# EAGLE board LoRa_Sensor_RevA1 (EAGLE 9.6.2)
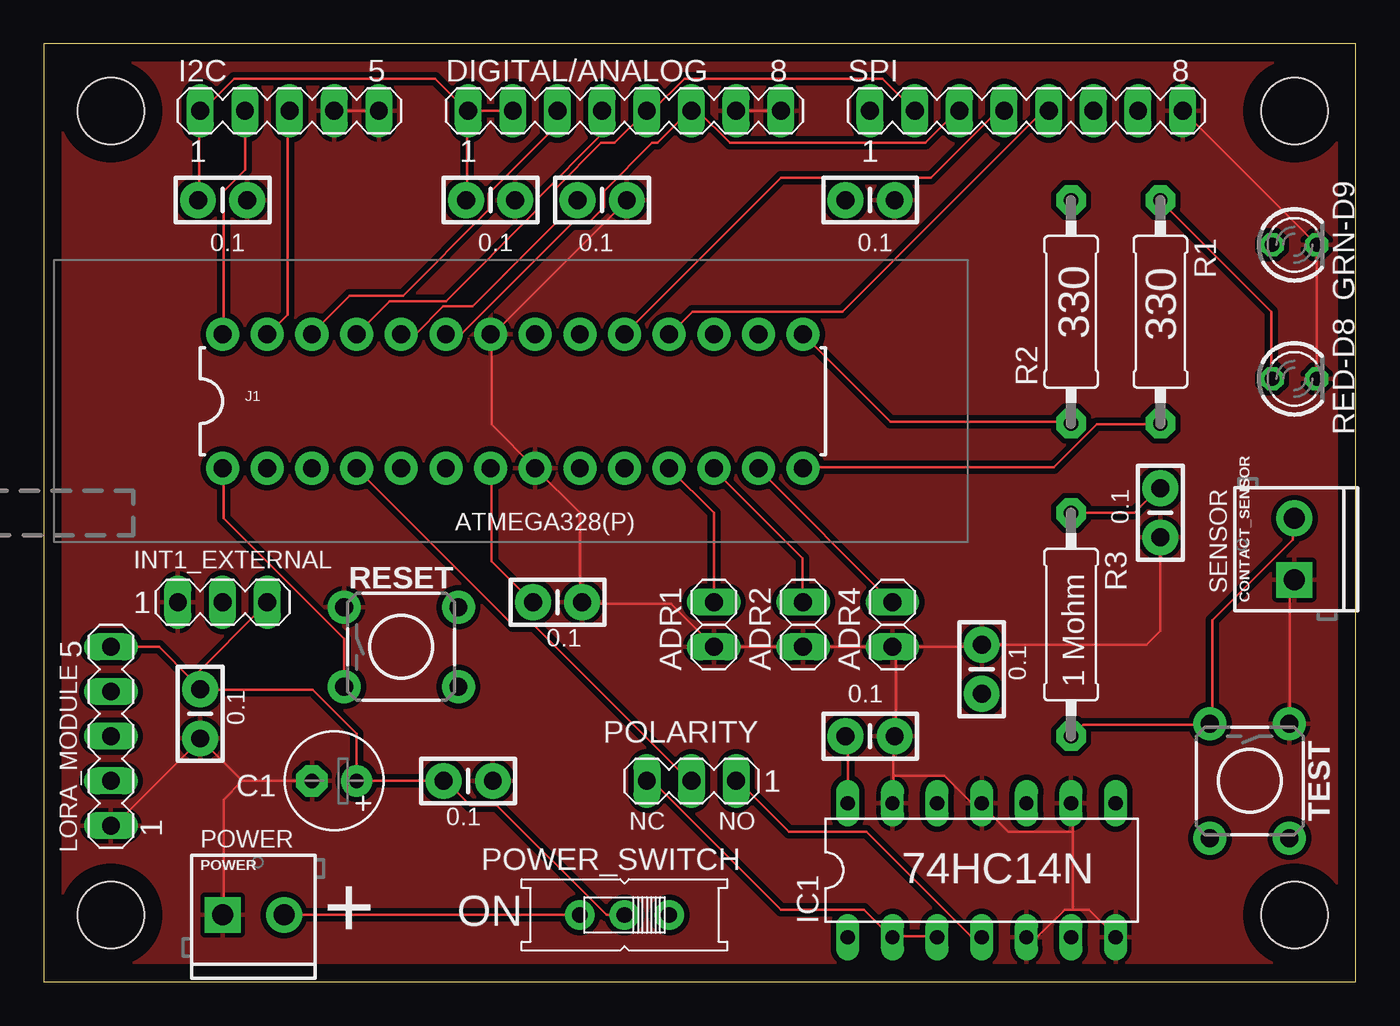
[diagram p0: board, top side]
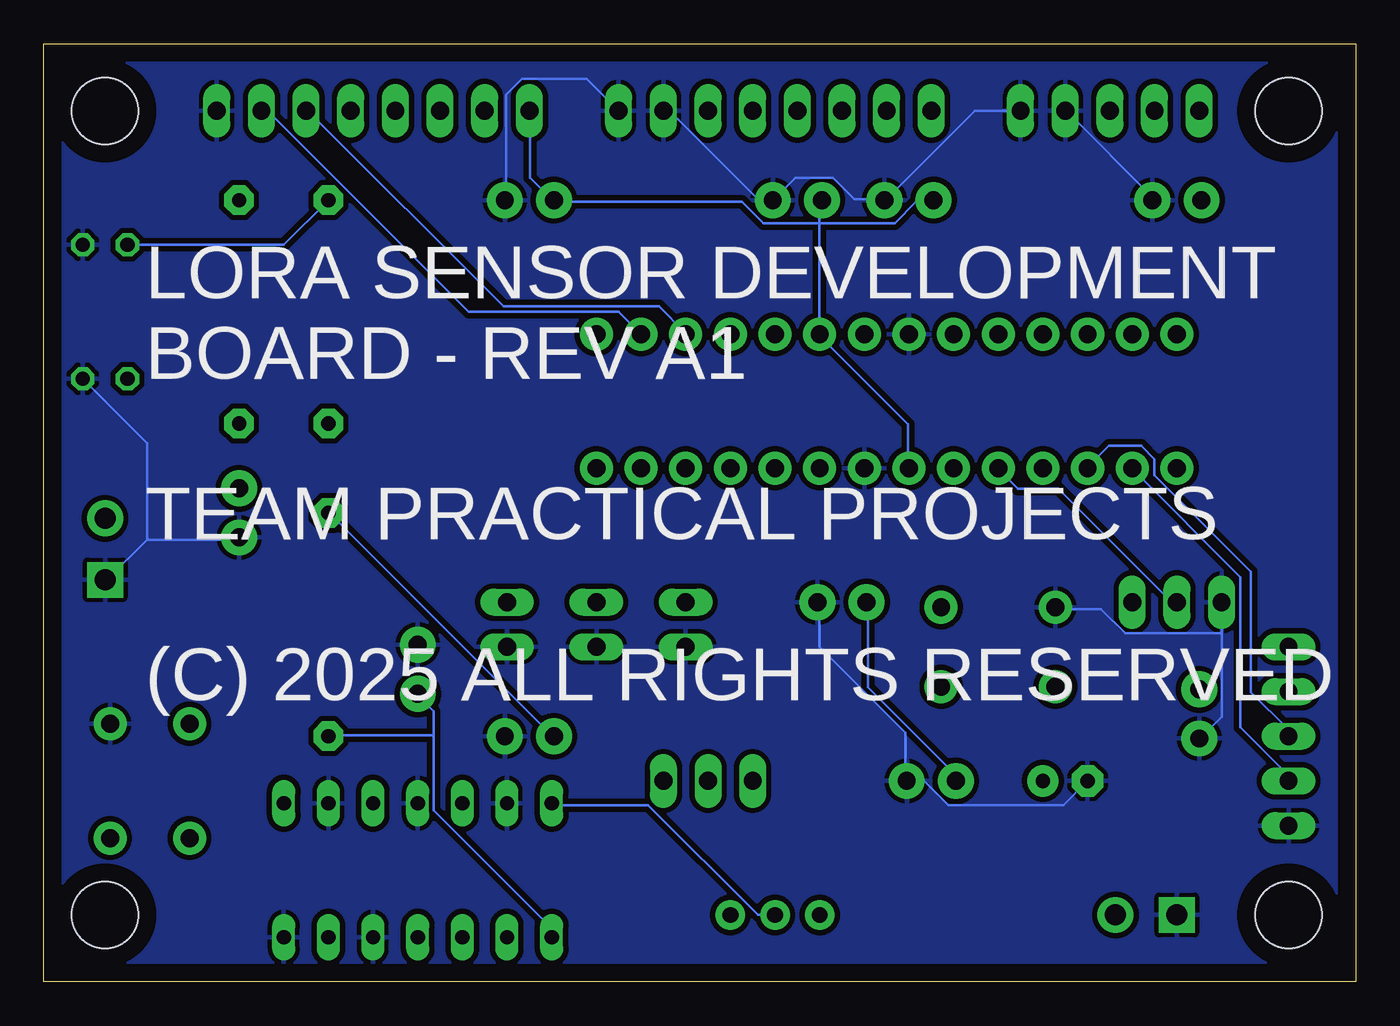
[diagram p1: board, bottom side, seen from below]

Size 74.6 x 53.33 mm. Coordinates in mm from the lower left corner, seen from the top.
Outline: 0,0 74.6,0 74.6,53.33 0,53.33 0,0
Copper layers (1*16): Top 0.035mm / dielectric 1.5mm / Bottom 0.035mm
Design rules "default": minimum track width 6mil, minimum drill 0.35mm, track to track 6mil, track to pad 6mil, pad to pad 6mil, via to via 6mil, smd to smd 6mil, copper to edge 40mil, drill to drill 6mil, minimum pad ring 10mil, minimum via ring 8mil, stop-mask expansion 4mil, vias tented up to drill 0mil, thermal gap 10mil
Holes 3.8 mm at 3.81,3.81 71.12,3.81 3.81,49.53 71.12,49.53

## Footprints (pad centres in the part's own frame; a part is rotated, then mirrored left to right if it is on the bottom)
1X02 = drill 1.016 long: 1 -1.27,0; 2 1.27,0
E2,5-6 = drill 0.813 pad 1.778: + -1.27,0 | drill 0.813 pad 1.778 octagon: - 1.27,0
CAP-PTH-SMALL-KIT = drill 1.016 pad 2.032: 1 -1.397,0; 2 1.397,0
SCREWTERMINAL-3.5MM-2 = drill 1.2 pad 2.032 square: 1 0,0 | drill 1.2 pad 2.032: 2 3.5,0
MA08-1 = drill 1.016 long: 1 -8.89,0; 2 -6.35,0; 3 -3.81,0; 4 -1.27,0; 5 1.27,0; 6 3.81,0; 7 6.35,0; 8 8.89,0
LED3MM = drill 0.813 octagon: A -1.27,0; K 1.27,0
MA05-1 = drill 1.016 long: 1 -5.08,0; 2 -2.54,0; 3 0,0; 4 2.54,0; 5 5.08,0
DIL14 = drill 0.813 long: 1 -7.62,-3.81; 2 -5.08,-3.81; 3 -2.54,-3.81; 4 0,-3.81; 5 2.54,-3.81; 6 5.08,-3.81; 7 7.62,-3.81; 8 7.62,3.81; 9 5.08,3.81; 10 2.54,3.81; 11 0,3.81; 12 -2.54,3.81; 13 -5.08,3.81; 14 -7.62,3.81
MA03-1 = drill 1.016 long: 1 -2.54,0; 2 0,0; 3 2.54,0
DIL28-3-ZIF_SOCKET = drill 1.016 pad 1.88: 1 -16.51,-3.81; 2 -13.97,-3.81; 3 -11.43,-3.81; 4 -8.89,-3.81; 5 -6.35,-3.81; 6 -3.81,-3.81; 7 -1.27,-3.81; 8 1.27,-3.81; 9 3.81,-3.81; 10 6.35,-3.81; 11 8.89,-3.81; 12 11.43,-3.81; 13 13.97,-3.81; 14 16.51,-3.81; 15 16.51,3.81; 16 13.97,3.81; 17 11.43,3.81; 18 8.89,3.81; 19 6.35,3.81; 20 3.81,3.81; 21 1.27,3.81; 22 -1.27,3.81; 23 -3.81,3.81; 24 -6.35,3.81; 25 -8.89,3.81; 26 -11.43,3.81; 27 -13.97,3.81; 28 -16.51,3.81
EG1218 = drill 0.9 pad 1.676: O -2.54,0; P 0,0; S 2.54,0
0309/12 = drill 0.813 pad 1.676 octagon: 1 -6.35,0; 2 6.35,0
TACTILE_SWITCH_PTH_6.0MM = drill 1.016 pad 1.88: 1 -3.251,2.261; 2 3.251,2.261; 3 -3.251,-2.261; 4 3.251,-2.261

## Placement (x,y rotation side)
ADR1  [1X02]  38.1,20.32 90 top
ADR2  [1X02]  43.18,20.32 90 top
ADR4  [1X02]  48.26,20.32 90 top
C1  100 uF  [E2,5-6]  16.51,11.43 180 top
C2  0.1uF  [CAP-PTH-SMALL-KIT]  25.4,44.45 0 top
C3  0.1uF  [CAP-PTH-SMALL-KIT]  10.16,44.45 0 top
C4  0.1uF  [CAP-PTH-SMALL-KIT]  8.89,15.24 270 top
C5  0.1uF  [CAP-PTH-SMALL-KIT]  46.99,13.97 0 top
C6  0.1uF  [CAP-PTH-SMALL-KIT]  29.21,21.59 0 top
C7  0.1uF  [CAP-PTH-SMALL-KIT]  53.34,17.78 90 top
C8  0.1uF  [CAP-PTH-SMALL-KIT]  24.13,11.43 0 top
C9  0.1uF  [CAP-PTH-SMALL-KIT]  63.5,26.67 270 top
C10  0.1uF  [CAP-PTH-SMALL-KIT]  46.99,44.45 0 top
C11  0.1uF  [CAP-PTH-SMALL-KIT]  31.75,44.45 0 top
CONTACT_SENSOR  [SCREWTERMINAL-3.5MM-2]  71.12,22.86 90 top
DIGITAL/ANALOG  [MA08-1]  33.02,49.53 0 top
GRN-D9  TLLG4400  [LED3MM]  71.12,41.91 0 top
I2C  [MA05-1]  13.97,49.53 0 top
IC1  74HC14N  [DIL14]  53.34,6.35 0 top
INT1_EXTERNAL  [MA03-1]  10.16,21.59 0 top
J1  ZIFSOCKET-28-3"  [DIL28-3-ZIF_SOCKET]  26.67,33.02 0 top
LORA_MODULE  [MA05-1]  3.81,13.97 90 top
POLARITY  [MA03-1]  36.83,11.43 180 top
POWER  [SCREWTERMINAL-3.5MM-2]  10.16,3.81 0 top
POWER_SWITCH  [EG1218]  33.02,3.81 180 top
R1  330  [0309/12]  63.5,38.1 270 top
R2  330  [0309/12]  58.42,38.1 90 top
R3  1 Mohm  [0309/12]  58.42,20.32 270 top
RED-D8  TLLR4400  [LED3MM]  71.12,34.29 0 top
RESET  MOMENTARY-SWITCH-SPST-PTH-6.0MM  [TACTILE_SWITCH_PTH_6.0MM]  20.32,19.05 0 top
SPI  [MA08-1]  55.88,49.53 0 top
TEST  MOMENTARY-SWITCH-SPST-PTH-6.0MM  [TACTILE_SWITCH_PTH_6.0MM]  68.58,11.43 270 top

## Library data of the parts
ADR1 ADR2 ADR4 = pinhead
C1 POWER_SWITCH R1-R3 = adafruit
C2-C11 = SparkFun-Capacitors; PROD_ID: CAP-08370
CONTACT_SENSOR POWER = SparkFun-Connectors; PROD_ID: CONN-08399
DIGITAL/ANALOG I2C INT1_EXTERNAL LORA_MODULE POLARITY SPI = con-lstb; OC_FARNELL: unknown; OC_NEWARK: unknown
GRN-D9 = led; MF: VISHAY SEMICONDUCTOR; OC_FARNELL: 1612435
IC1 = 74xx-eu
J1 = SparkFun-Connectors; PROD_ID: CONN-10960; SF_ID: PRT-09175
RED-D8 = led; MF: VISHAY SEMICONDUCTOR; OC_FARNELL: 1612437
RESET TEST = SparkFun-Switches; PROD_ID: SWCH-08441; SF_SKU: COM-00097

## Nets
!SS: J1.16 SPI.7
ATMEGA_!RESET: J1.1 RESET.3
ATMEGA_RXD: J1.2 LORA_MODULE.2
ATMEGA_TXD: J1.3 LORA_MODULE.3
D14: DIGITAL/ANALOG.6 J1.23 SPI.3
D15: DIGITAL/ANALOG.5 J1.24 SPI.2
D16: DIGITAL/ANALOG.4 J1.25
D17: DIGITAL/ANALOG.3 J1.26
GND: ADR1.1 ADR2.1 ADR4.1 C1.- C2.2 C3.2 C4.2 C5.2 C6.2 C7.2 C8.2 C9.2 C10.2 C11.2 CONTACT_SENSOR.1 DIGITAL/ANALOG.7 DIGITAL/ANALOG.8 GRN-D9.K I2C.4 I2C.5 IC1.5 IC1.7 IC1.9 IC1.11 IC1.13 INT1_EXTERNAL.1 J1.8 J1.22 LORA_MODULE.1 POWER.1 RED-D8.K RESET.1 SPI.8 TEST.1
INT0: J1.4 POLARITY.2
INT1: INT1_EXTERNAL.2 J1.5
MISO: J1.18 SPI.5
MOSI: J1.17 SPI.6
N$1: C7.1 CONTACT_SENSOR.2 IC1.1 R3.2 TEST.3
N$2: POWER.2 POWER_SWITCH.S
N$3: J1.15 R2.1
N$4: GRN-D9.A R2.2
N$5: J1.14 R1.2
N$6: R1.1 RED-D8.A
N$7: ADR4.2 J1.13
N$8: IC1.2 IC1.3 POLARITY.3
N$9: IC1.4 POLARITY.1
N$10: ADR2.2 J1.12
N$11: ADR1.2 J1.11
SCK: J1.19 SPI.4
SCL: I2C.2 J1.28
SDA: I2C.3 J1.27
VCC: C1.+ C2.1 C3.1 C4.1 C5.1 C6.1 C8.1 C9.1 C10.1 C11.1 DIGITAL/ANALOG.1 DIGITAL/ANALOG.2 I2C.1 IC1.14 INT1_EXTERNAL.3 J1.7 J1.20 LORA_MODULE.5 POWER_SWITCH.P R3.1 SPI.1

## Tracks (layer width: path | path; a pad name or v marks a point on that pad's centre or on a via)
!SS
  Bottom 0.152: SPI.7 61.87,49.53 50.44,38.1 41.91,38.1 J1.16
ATMEGA_!RESET
  Top 0.152: RESET.3 17.07,19.51 10.21,26.36 10.21,29.11 J1.1
ATMEGA_RXD
  Bottom 0.152: LORA_MODULE.2 3.81,11.73 6.55,14.48 6.55,23.01 12.65,29.11 J1.2
ATMEGA_TXD
  Bottom 0.152: LORA_MODULE.3 3.81,14.33 5.94,16.46 5.94,23.32 11.43,28.8 11.43,29.72 12.19,30.48 14.02,30.48 15.24,29.26 J1.3
D14
  Top 0.152: SPI.3 51.97,49.53 50.14,47.7 39.01,47.7 37.19,49.53 DIGITAL/ANALOG.6 36.73,49.53 34.9,47.7 34.59,47.7 31.85,44.96 31.85,44.04 30.94,43.13 30.02,43.13 23.77,36.88 22.86,36.88 J1.23
D15
  Top 0.152: SPI.2 47.7,51.36 36.42,51.36 34.59,49.53 DIGITAL/ANALOG.5 32.46,47.7 31.7,47.7 29.11,45.11 29.11,43.13 24.38,38.41 22.71,38.41 21.18,36.88 20.42,36.88 J1.24
D16
  Top 0.152: J1.25 19.66,38.71 22.86,38.71 28.04,43.89 28.04,44.5 31.7,48.16 31.7,49.53 DIGITAL/ANALOG.4
D17
  Top 0.152: DIGITAL/ANALOG.3 29.11,49.53 29.11,48.62 25.3,44.81 25.3,43.89 20.42,39.01 17.37,39.01 15.24,36.88 J1.26
GND
  Top 0.152: TEST.1 70.87,14.78 70.87,22.71 71.02,22.86 CONTACT_SENSOR.1 | RED-D8.K GRN-D9.K SPI.8 | I2C.5 I2C.4 | DIGITAL/ANALOG.8 DIGITAL/ANALOG.7 | LORA_MODULE.1 3.81,8.99 4.12,8.99 8.84,13.72 C4.2 8.99,13.72 11.28,11.43 | 11.28,11.43 C1.- | 11.28,11.43 10.21,10.36 10.21,3.81 POWER.1 | 25.45,36.73 25.45,31.7 J1.8 30.48,26.67 30.48,21.64 C6.2 30.63,21.49 35.66,21.49 ADR1.1 ADR2.1 ADR4.1 | 58.52,4.12 59.44,4.12 60.96,2.59 IC1.7 | 58.52,4.12 58.06,4.12 56.54,2.59 55.93,2.59 IC1.5 | 58.52,4.12 58.52,8.53 | 58.52,8.53 58.52,10.06 IC1.9 | 48.31,11.73 48.31,13.87 C5.2 48.46,14.02 48.46,19.05 | 48.31,11.73 48.31,10.21 IC1.13 | 48.31,11.73 51.21,11.73 52.73,10.21 53.34,10.21 IC1.11 53.34,10.06 54.86,8.53 58.52,8.53 | ADR4.1 48.46,19.05 | 48.46,19.05 53.34,19.05 C7.2 62.71,19.18 63.5,19.96 C9.2 | 48.31,19.05 ADR4.1 | 25.45,36.73 33.07,44.35 C11.2 | 25.45,36.73 J1.22
  Bottom 0.152: 68.73,25.15 63.55,25.15 C9.2 | 68.73,25.15 71.02,22.86 CONTACT_SENSOR.1 | 68.73,25.15 68.73,30.63 RED-D8.K | I2C.4 16.46,49.53 11.43,44.5 C3.2 | DIGITAL/ANALOG.7 39.01,49.53 33.98,44.5 33.22,44.5 C11.2 33.07,44.5 31.85,45.72 29.72,45.72 28.5,44.5 26.82,44.5 C2.2 26.67,44.5 21.64,49.53 I2C.5 | DIGITAL/ANALOG.8 43.74,51.36 47.4,51.36 48.31,50.44 48.31,44.5 C10.2 | 7.62,19.81 7.62,15.09 8.84,13.87 C4.2 | 7.62,19.81 INT1_EXTERNAL.1 | 7.62,19.81 13.11,19.81 14.48,21.18 17.07,21.18 RESET.1 | C1.- 16.61,10.06 23.16,10.06 24.54,11.43 C8.2 25.6,11.43 25.6,14.17 30.48,19.05 30.48,21.49 C6.2
  pour Top (isolate 0.305): 0,0 0,53.34 74.93,53.34 74.93,0
  pour Bottom (isolate 0.305): 0,0 0,53.34 74.93,53.34 74.93,0
INT0
  Top 0.152: POLARITY.2 36.73,11.43 27.89,20.27 26.67,20.27 17.83,29.11 J1.4
INT1
  Bottom 0.152: INT1_EXTERNAL.2 10.21,21.64 10.52,21.64 16.92,28.04 19.2,28.04 20.27,29.11 J1.5
MISO
  Top 0.152: SPI.5 56.84,49.53 45.41,38.1 36.88,38.1 35.66,36.88 J1.18
MOSI
  Bottom 0.152: SPI.6 59.59,49.53 48.46,38.41 39.62,38.41 38.1,36.88 J1.17
N$1
  Top 0.152: R3.2 58.52,14.02 59.13,14.63 66.29,14.63 TEST.3 66.45,14.78 66.45,20.57 71.02,25.15 71.02,26.21 CONTACT_SENSOR.2
  Bottom 0.152: IC1.1 45.72,3.05 52.43,9.75 52.43,14.02 | 52.43,14.02 52.43,15.39 53.34,16.31 C7.1 | 52.43,14.02 58.37,14.02 R3.2
N$2
  Top 0.152: POWER.2 POWER_SWITCH.S
N$3
  Top 0.152: J1.15 48.16,31.85 58.37,31.85 R2.1
N$4
  Bottom 0.152: GRN-D9.A 60.96,41.91 R2.2
N$5
  Top 0.152: R1.2 63.4,31.7 59.89,31.7 57.45,29.26 43.28,29.26 J1.14
N$6
  Top 0.152: RED-D8.A 69.8,34.29 69.8,38.1 63.55,44.35 R1.1
N$7
  Top 0.152: ADR4.2 48.16,21.64 40.69,29.11 J1.13
N$8
  Top 0.152: IC1.3 50.75,2.59 48.31,2.59 IC1.2 48.16,2.59 46.63,4.12 41.91,4.12 34.59,11.43 POLARITY.3
N$9
  Top 0.152: IC1.4 53.34,2.59 52.73,2.59 46.79,8.53 42.37,8.53 39.47,11.43 POLARITY.1
N$10
  Top 0.152: ADR2.2 43.13,21.64 43.13,24.08 38.1,29.11 J1.12
N$11
  Top 0.152: ADR1.2 38.1,26.67 J1.11
SCK
  Top 0.152: SPI.4 54.25,49.53 50.44,45.72 41.91,45.72 J1.19
SCL
  Top 0.152: I2C.2 11.43,46.18 10.21,44.96 10.21,36.88 J1.28
SDA
  Top 0.152: I2C.3 13.87,49.53 13.87,37.95 12.8,36.88 J1.27
VCC
  Top 0.152: C3.1 8.84,44.5 8.84,49.53 I2C.1 8.99,49.53 10.82,51.36 22.25,51.36 24.08,49.53 | DIGITAL/ANALOG.2 DIGITAL/ANALOG.1 24.08,49.53 | 24.08,49.53 24.08,44.5 C2.1 | J1.7 25.45,29.11 25.45,23.93 27.74,21.64 C6.1 | LORA_MODULE.5 6.55,19.05 8.38,17.22 | 8.38,17.22 8.84,16.76 C4.1 | 8.38,17.22 12.65,21.49 INT1_EXTERNAL.3 | 8.38,17.22 C4.1 | R3.1 62.03,26.67 63.4,28.04 C9.1 | IC1.14 45.72,13.87 C5.1 | POWER_SWITCH.P 32,3.81 25.76,10.06 24.23,10.06 22.86,11.43 C8.1 C1.+ 17.78,14.12 15.29,16.61 8.99,16.61 C4.1
  Bottom 0.152: SPI.1 46.94,49.53 46.94,45.72 45.72,44.5 C10.1 45.57,44.35 34.9,44.35 33.68,43.13 30.48,43.13 | 30.48,43.13 30.48,44.35 C11.1 | 30.48,43.13 J1.20 30.48,36.73 25.45,31.7 25.45,29.26 J1.7 | 30.48,43.13 26.21,43.13 24.99,44.35 24.08,44.35 C2.1 | POWER_SWITCH.P 33.98,3.81 40.23,10.06 45.72,10.06 IC1.14 | R3.1 58.37,26.67 45.72,14.02 C5.1 | C6.1 27.74,21.49 27.74,16.76 22.86,11.89 22.86,11.43 C8.1

## Text on the board
tPlace: 0.1 | 0.1 | 0.1 | 0.1 | 330 | 330 | ATMEGA328(P) | 0.1 | SENSOR | 0.1 | 0.1 | 1 Mohm | 0.1 | 0.1 | 0.1 | NC | NO | POWER | 74HC14N | + | ON
bPlace: LORA SENSOR DEVELOPMENT / BOARD - REV A1 / / TEAM PRACTICAL PROJECTS / / (C) 2025 ALL RIGHTS RESERVED